# Altium PCB PCB1.PcbDoc
Units mm, origin at the board's own origin, x right, y up, seen from the top; angles counter-clockwise.
Board outline 100 x 100 mm, 2 copper layers (Top Layer, Bottom Layer); 30 components, 39 nets, 158 pads, 27 vias.
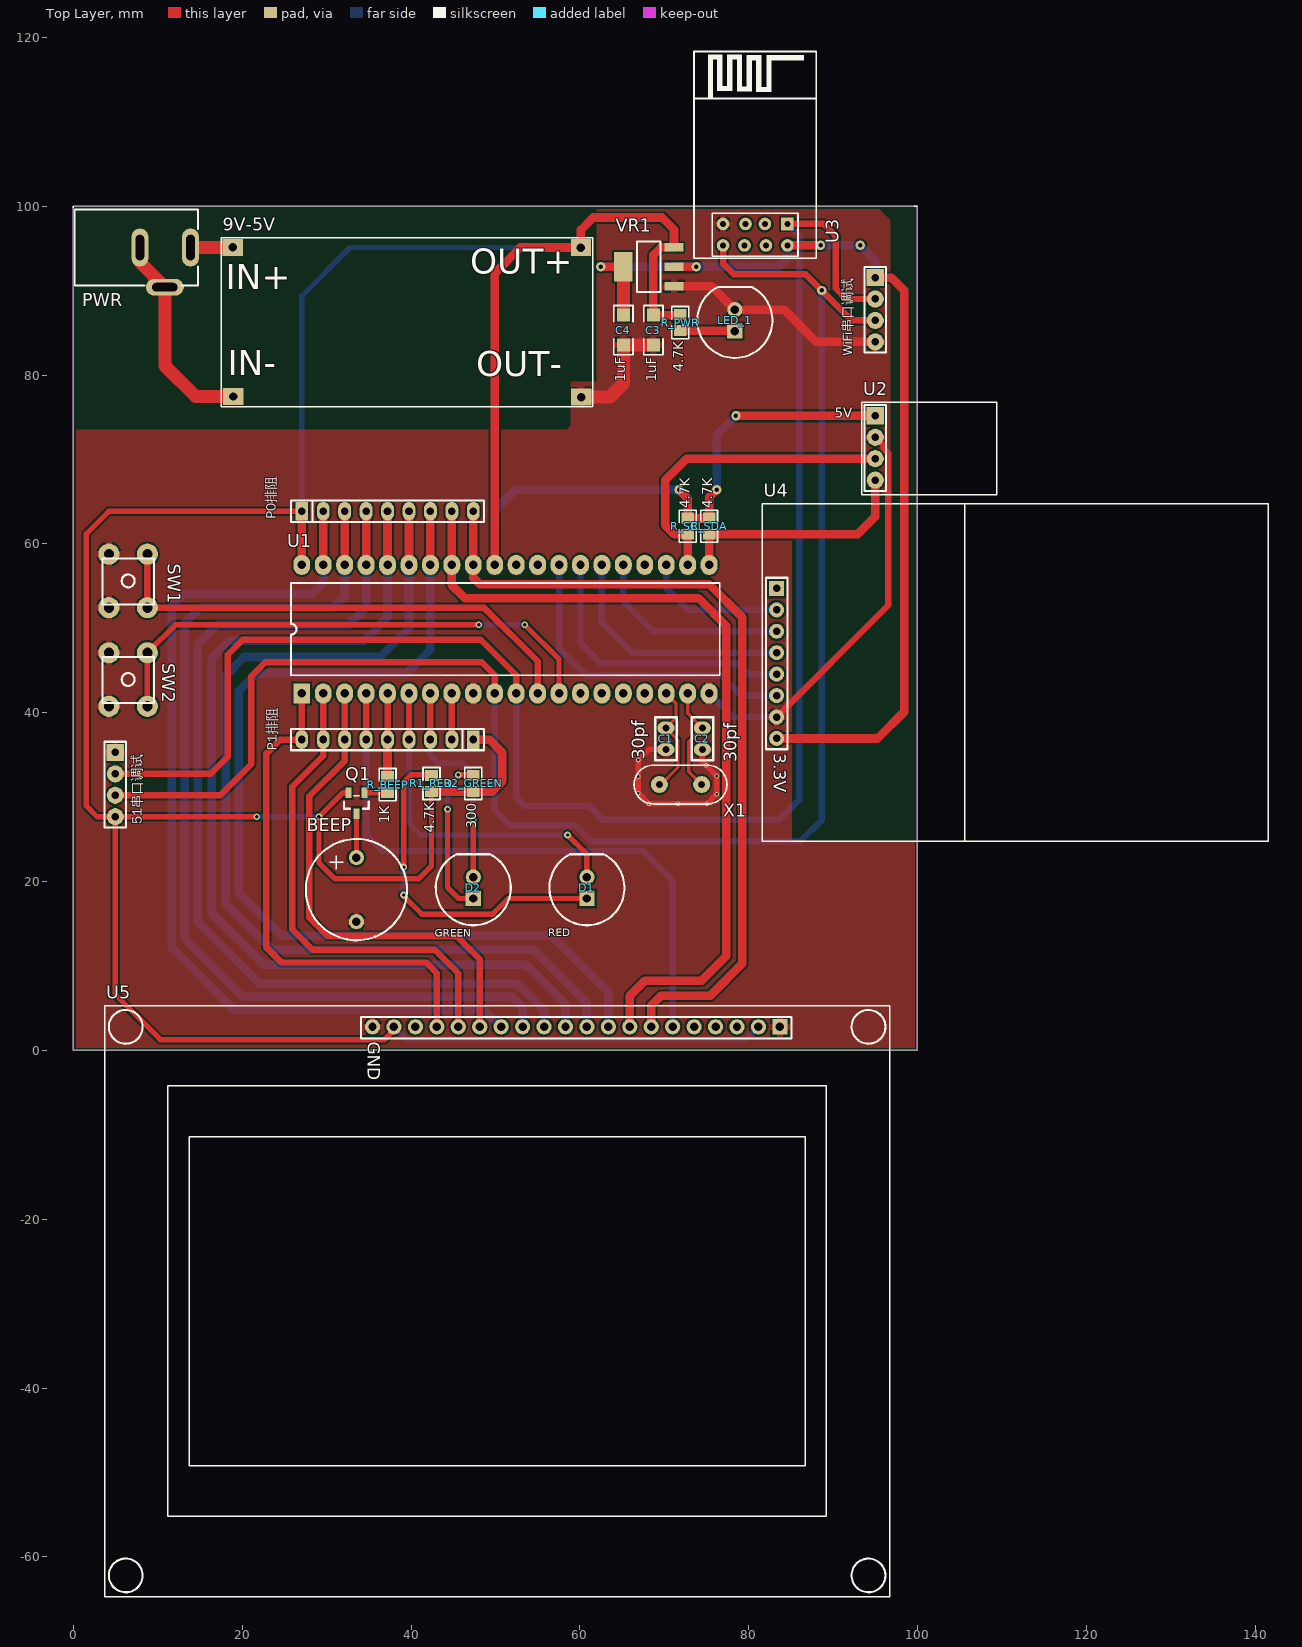
[diagram p0: Top Layer view]
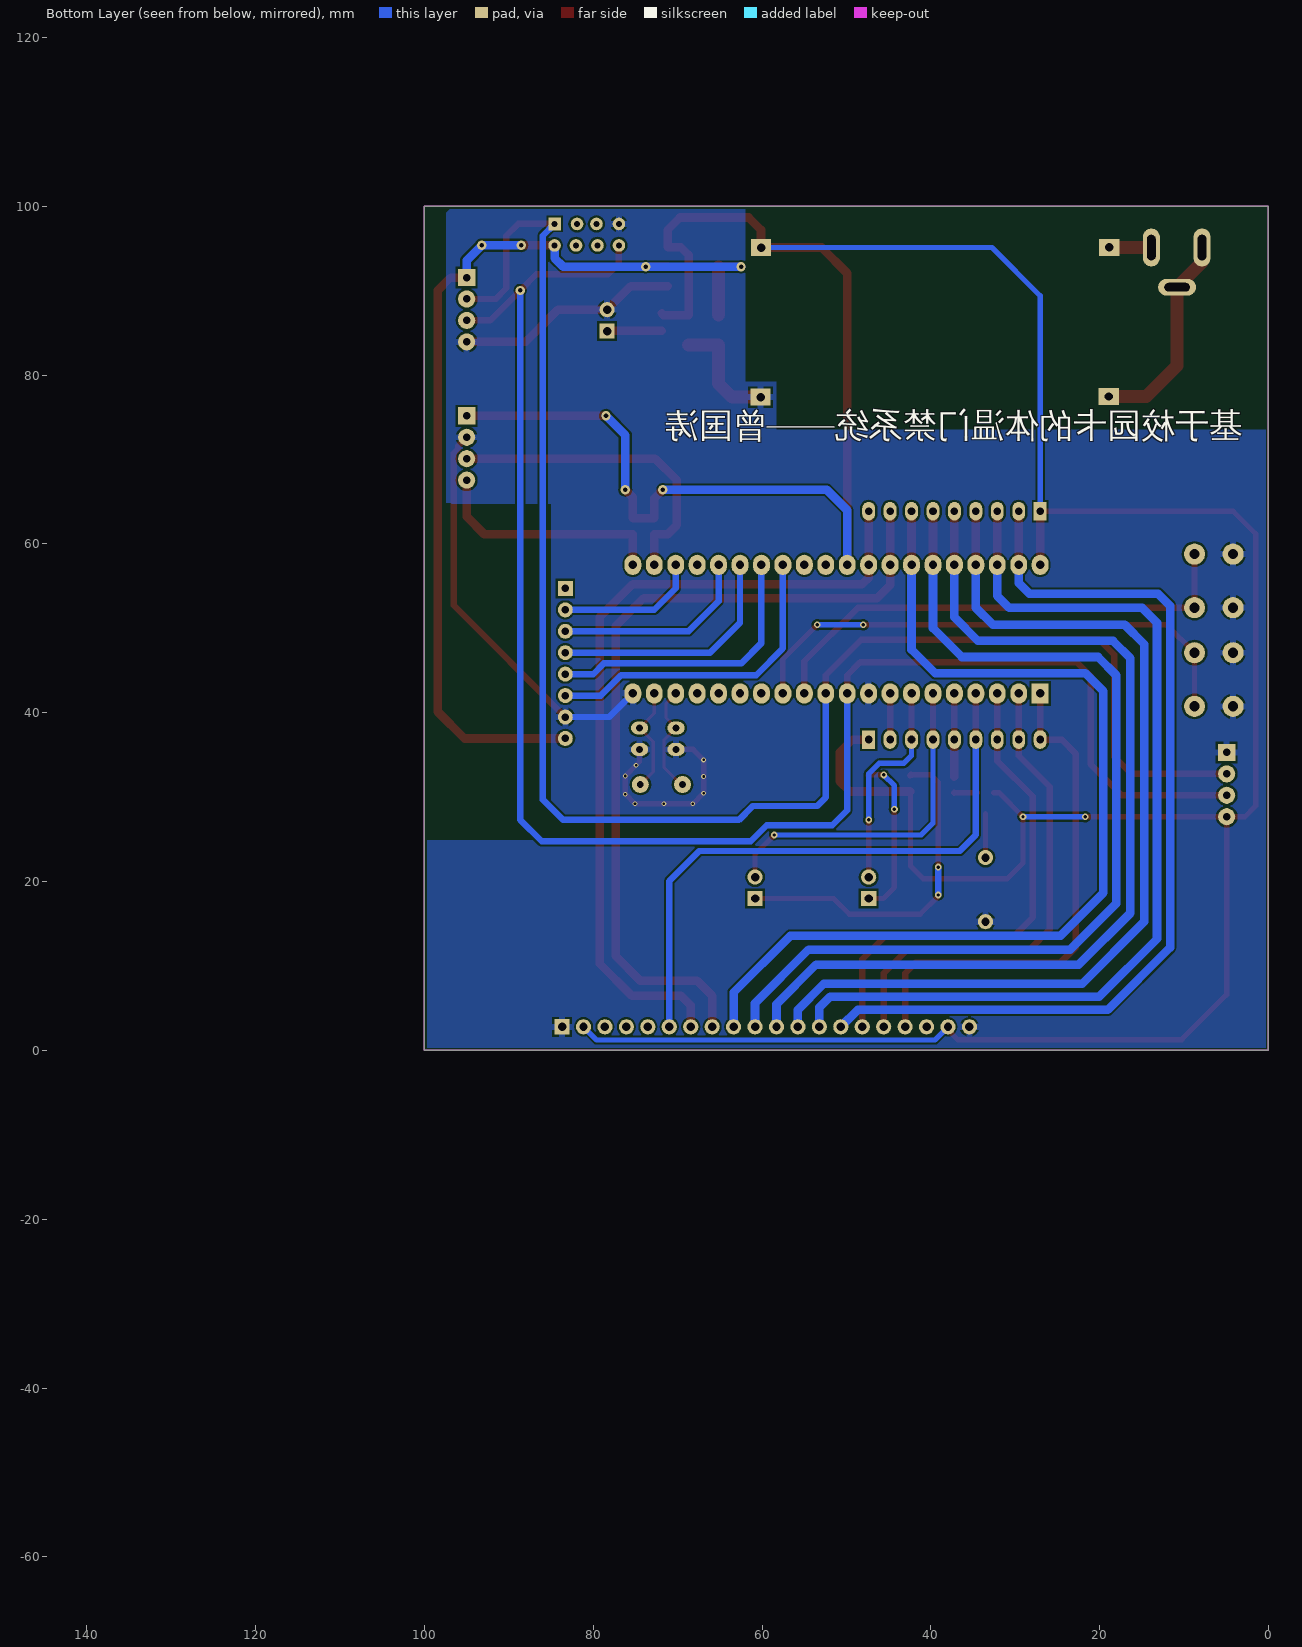
[diagram p1: Bottom Layer view, seen from below]

## Layer stack, top to bottom
Top Solder: solder mask 0.0102, Solder Resist, Dk 3.5
Top Layer: signal copper 0.0356
Dielectric 1: dielectric 0.32, FR-4, Dk 4.8
Bottom Layer: signal copper 0.0356
Bottom Solder: solder mask 0.0102, Solder Resist, Dk 3.5

## Board outline
0,0 100,0 100,100 0,100

## Design rules (kind name [scope] priority, off if disabled: settings)
Clearance [(IsTrack) vs (IsTrack)] p1 off: gap=0.152
Clearance POLY [InPolygon] p2: gap=0.254
Clearance VIA-POLY [ISVIA vs InPolygon] p3: gap=0.152
Clearance all [All] p4: gap=0.152
DiffPairsRouting DiffPair_90DiffPairsRouting [InDifferentialPairClass('90OM')] p1: maxlimit=0.178 minlimit=0.178 mostfreqgap=0.178 toplayer_minwidth=0.152 toplayer_maxwidth=0.152 toplayer_prefwidth=0.152 bottomlayer_minwidth=0.152 bottomlayer_maxwidth=0.152 bottomlayer_prefwidth=0.152 maxuncoupledlength=12.7
MatchedLengths DiffPair_90MatchedLengths [InDifferentialPair ('D_D')] p1: tolerance=25.4 checknetsindiffpair=FALSE checkdiffpairvsdiffpair=TRUE checkxsignals=TRUE checkothers=TRUE
PolygonConnect PolygonConnect_1 [ISVIA] p1: connectstyle=Direct reliefconductorwidth=0.254 reliefentries=4 polygonreliefangle="90 Angle" airgapwidth=0.254
PolygonConnect [All] p2: connectstyle=Relief reliefconductorwidth=0.762 reliefentries=4 polygonreliefangle="90 Angle" airgapwidth=0.254
RoutingVias [All] p1: holewidth=0.305 width=0.559 viastyle="Through Hole" minholewidth=0.305 minwidth=0.559 maxholewidth=1.524 maxwidth=3.048
SilkToSilkClearance [All] p1: silktosilkclearance=0.051
SilkToSolderMaskClearance [IsPad] p1: minsilkscreentomaskgap=0.051 clearancetoexposedcopper=TRUE
SolderMaskExpansion [All] p1: expansion=0.064
Width PWR [InNetClass('PWR')] p1: maxlimit=1.524 minlimit=0.152 preferedwidth=0.762
Width [All] p2: maxlimit=1.524 minlimit=0.152 preferedwidth=0.254
27 further rules are at their usual default settings.

## Components (designator, comment, footprint, x,y, rotation, side; value= is the part's Value field where it differs from the comment)
9V-5V "5A DC-DC可调降压电源模块" "5A DC-DC降压" 17.501,76.276 r0 top
51串口调试 "51_UART" HDR1*4 4.953,35.306 r0 top
BEEP "BEEP_蜂鸣器" BEEP_蜂鸣器 33.528,19.05 r0 top
C1 "30pf" RAD-0.1 70.231,36.957 r90 top
C2 "30pf" RAD-0.1 74.549,36.957 r90 top
C3 "1uF" 1206 68.707,85.344 r270 top
C4 "1uF" 1206 65.151,85.344 r270 top
D1 "RED" LED-R 60.833,17.995 r90 top
D2 "GREEN" LED-R 47.371,17.995 r90 top
LED_1 "LED_Plug_3" LED-R 78.359,85.217 r90 top
P0排阻 "10K" 排阻-9 27.102,63.854 r0 top
P1排阻 "10K" 排阻-9 47.32,36.857 r180 top
PWR "DC-005插座" DC-005插座 13.874,95.123 r180 top
Q1 "S8550" SOT-23(SOT-23-3) 33.528,29.286 r90 top
R1_RED "4.7K" 0805 42.418,31.623 r90 top
R2_GREEN "300" 0805 47.371,31.623 r90 top
R_BEEP "1K" 0805 37.211,31.496 r270 top
R_PWR "4.7K" 0805 71.882,86.233 r90 top
R_SCL "4.7K" 0805 72.771,62.103 r90 top
R_SDA "4.7K" 0805 75.311,62.103 r90 top
SW1 "P3_2" 6*6开关 4.191,58.801 r0 top
SW2 "P3_3" 6*6开关 4.191,47.117 r0 top
U1 "STC89C52_Plug" DIP-40 27.051,42.291 r90 top
U2 "I2C_MLX90614" I2C_MLX90614 93.37,76.81 r270 top
U3 "ESP01/01-S" ESP01/01-S 80.772,96.647 r0 top
U4 "RFID_RC522" RFID_RC522 81.585,64.77 r270 top
U5 "LCD12864_P20" LCD12864_P20 96.693,5.294 r180 top
VR1 "AMS1117-3.3" SOT-223 68.151,92.837 r0 top
WiFi串口调试 "WiFi_UART" HDR1*4 94.996,91.567 r0 top
X1 "11.0596MHz" XTAL1 69.422,31.496 r0 top

## Footprints (in the part's own frame and the unit in brackets; to place one, negate y for a bottom-side part, rotate by r counter-clockwise, add the part's x,y. Pads: shape width x height; smd on the part's side, far side on the other; paste and mask are expansions set on the pad)
"5A DC-DC降压" [mm]
  rect 2.4x2 hole 1: 1(1.372,18.872) 2(1.422,1.194) 3(42.621,18.847) 4(42.672,1.118)
  silkscreen extent 0,0 44,20
6*6开关 [mm]
  round 2.5 hole 1.2: 1(0,-6.35) 1(0,0) 2(4.572,-6.35) 2(4.572,0)
  silkscreen extent -0.76,-5.97 5.33,-0.51, body extent -0.84,-6.4 5.36,0.15, height 5
0805 [mm]
  rect 1.3x1.5 smd: 1(-0.95,0) 2(0.95,0)
  silkscreen extent -1.9,-1 1.9,1, body extent -1,-0.63 1,0.63, height 0.55
1206 [mil] "贴片元件"
  rect 60x60 smd: 1(-70,0) 2(70,0)
  silkscreen extent -115,-45 115,45, body extent -75,-35 75,35, height 39
BEEP_蜂鸣器 [mm]
  round 1.8 hole 1: 1(0,3.8) 2(0,-3.8)
  silkscreen extent -6,-6 6,6
DC-005插座 [mm]
  oval 2x4.5 hole 1 slot 3 at 90 deg: 1(0,0) 3(6,0)
  oval 4.5x2 hole 1 slot 3 at 0 deg: 2(3.048,4.7)
  silkscreen extent -0.88,-4.5 13.72,4.5, body extent -0.89,-4.44 13.72,4.45, height 11
DIP-40 [mm]
  rect 2.4x2 hole 1: 1(0,0)
  oval 2.4x2 hole 1: 2(0,-2.54) 3(0,-5.08) 4(0,-7.62) 5(0,-10.16) 6(0,-12.7) 7(0,-15.24) 8(0,-17.78) 9(0,-20.32) 10(0,-22.86) 11(0,-25.4) 12(0,-27.94) 13(0,-30.48) 14(0,-33.02) 15(0,-35.56) 16(0,-38.1) 17(0,-40.64) 18(0,-43.18) 19(0,-45.72) 20(0,-48.26) 21(15.24,-48.26) 22(15.24,-45.72) 23(15.24,-43.18) 24(15.24,-40.64) 25(15.24,-38.1) 26(15.24,-35.56) 27(15.24,-33.02) 28(15.24,-30.48) 29(15.24,-27.94) 30(15.24,-25.4) 31(15.24,-22.86) 32(15.24,-20.32) 33(15.24,-17.78) 34(15.24,-15.24) 35(15.24,-12.7) 36(15.24,-10.16) 37(15.24,-7.62) 38(15.24,-5.08) 39(15.24,-2.54) 40(15.24,0)
  silkscreen extent 2.16,-49.53 13.08,1.27, body extent -1.17,-50.29 16.43,1.97, height 8.39
ESP01/01-S [mm]
  rect 1.5x1.5 hole 0.7: 1(3.81,1.27)
  round 1.5 hole 0.7: 2(1.15,1.27) 3(-1.15,1.27) 4(-3.81,1.27) 5(3.81,-1.27) 6(1.27,-1.27) 7(-1.27,-1.27) 8(-3.81,-1.27)
  silkscreen extent -7.25,-2.79 7.25,21.71
HDR1*4 [mil]
  rect 80x80 hole 35: 1(0,0)
  round 80 hole 35: 2(0,-100) 3(0,-200) 4(0,-300)
  silkscreen extent -50,-350 50,50, body extent -50,-350 50,50, height 336
I2C_MLX90614 [mil]
  rect 80x80 hole 35: 1(64,64)
  round 80 hole 35: 2(164,64) 3(264,64) 4(364,64)
  silkscreen extent 0,0 433,630, body extent 14,14 414,114, height 336
LCD12864_P20 [mm]
  round 1.8 hole 1: 1(61.26,2.5) 2(58.72,2.5) 3(56.18,2.5) 4(53.64,2.5) 5(51.1,2.5) 6(48.56,2.5) 7(46.02,2.5) 8(43.48,2.5) 9(40.94,2.5) 10(38.4,2.5) 11(35.86,2.5) 12(33.32,2.5) 13(30.78,2.5) 14(28.24,2.5) 15(25.7,2.5) 16(23.16,2.5) 17(20.62,2.5) 18(18.08,2.5) 19(15.54,2.5)
  rect 1.8x1.8 hole 1: 20(13,2.5)
  silkscreen extent 0,0 93,70, body extent 11.73,1.23 62.53,3.77, height 8.54
LED-R [mm]
  rect 1.8x1.8 hole 1: 1(0,0)
  round 1.8 hole 1: 2(2.54,0)
  silkscreen extent -3.17,-4.44 5.25,4.44, body extent -3.23,-4.5 5.3,4.5, height 11
RAD-0.1 [mm]
  oval 1.524x2.032 hole 0.8: 1(-1.297,0.035) 2(1.243,0.035)
  silkscreen extent -2.57,-1.23 2.51,1.31, body extent -2.01,-1.95 1.96,2.02, height 7.39
RFID_RC522 [mil]
  rect 70x70 hole 35: 1(395,68)
  round 70 hole 35: 2(495,68) 3(595,68) 4(695,68) 5(795,68) 6(895,68) 7(995,68) 8(1095,68)
  silkscreen extent 0,0 1575,2362, body extent 345,18 1145,118, height 336
SOT-23(SOT-23-3) [mm]
  rect 1.25x0.7 smd: 1(1.25,-0.95) 2(1.25,0.95) 3(-1.25,0)
  silkscreen extent -0.65,-1.46 0.9,1.46, body extent -1.5,-1.5 1.5,1.5, height 1.3
SOT-223 [mm]
  rect 2.2x1 smd: 1(3,-2.3) 2(3,0) 3(3,2.3)
  rect 2.2x3.5 smd: 2(-3,0)
  silkscreen extent -1.4,-3 1.4,3, body extent -3.49,-3.24 3.49,3.24, height 1.64
XTAL1 [mm]
  round 2 hole 0.8: 1(0,0) 2(5,0)
  silkscreen extent -3,-2.3 8,2.3, body extent -2.79,-1.52 7.87,1.52, height 3.09
排阻-9 [mm]
  rect 1.524x2.2 hole 0.9: 1(-0.051,0.027)
  oval 1.524x2.2 hole 0.9: 2(2.489,0.027) 3(5.029,0.027) 4(7.569,0.027) 5(10.109,0.027) 6(12.649,0.027) 7(15.189,0.027) 8(17.729,0.027) 9(20.269,0.027)
  silkscreen extent -1.32,-1.24 21.54,1.3, body extent -1.15,-0.66 21.35,2.77, height 4.3

## Part data
51串口调试 WiFi串口调试: library part HEADER_直插式排针_1*4P
C1 C2: library part CAP_直插式电容_2.54
C3 C4: library part CAP_1206贴片电容
D1 D2 LED_1: library part LED_直插式_3MM
P0排阻 P1排阻: library part 排阻_P9
Q1: library part PNP
R1_RED R2_GREEN R_BEEP R_PWR R_SCL R_SDA: library part RES_电阻
SW1 SW2: library part SWITCH_开关
U1: library part 直插芯片_STC89C52
VR1: library part "SOT-223 AMS1117-3.3", "低压差线性稳压(LDO)"
X1: library part XTAL_直插式晶振_4.88MM

## Via types
v1: diameter 0.8, hole 0.4, Top Layer to Bottom Layer, tented both sides, 10 vias
v2: diameter 0.559, hole 0.305, Top Layer to Bottom Layer, tented both sides, 9 vias
v3: diameter 1.1, hole 0.55, Top Layer to Bottom Layer, tented both sides, 8 vias

## Nets (pads, with @x,y where several pads share a name; then routed paths per layer and width w, separated by ;. In a path a pad name is that pad's centre, name@x,y a point inside that pad or via, vN(x,y) a via of type N, cw(c..) or ccw(c..) an arc to the next point about the centre after c; other vN are vias at no path point)
3.3V: C4.1 U3.5 U4.8 VR1.2 WiFi串口调试.1 | length 118.6
  Top Layer w1.016: v3(62.484,92.837) VR1.2@65.151,92.837 ; VR1.2@71.151,92.837 v3(73.787,92.837) ; U4.8 95.25,36.957 98.425,40.132 98.425,90.043 96.901,91.567 WiFi串口调试.1 ; U3.5 v3(88.519,95.377)
  Top Layer w1.524: C4.1 VR1.2@65.151,92.837
  Bottom Layer w1.016: v3(62.484,92.837) v3(73.787,92.837) 83.566,92.837 84.582,93.853 U3.5 ; v3(88.519,95.377) v3(93.218,95.377) 94.996,93.599 WiFi串口调试.1
5V: 9V-5V.3 51串口调试.4 C3.1 P0排阻.1 P1排阻.1 Q1.2 R1_RED.1 R2_GREEN.1 R_PWR.2 R_SCL.2 R_SDA.2 U1.31 U1.40 U2.1 U5.2 U5.19 VR1.3 | length 447.5
  Top Layer w0.635: v1(21.717,27.686) 51串口调试.4 ; P0排阻.1 4.191,63.881 1.524,61.214 1.524,28.956 2.794,27.686 51串口调试.4 ; Q1.2 31.933,30.536 v1(29.083,27.686) 29.083,22.225 30.988,20.32 40.894,20.32 42.418,21.844 R1_RED.1 ; U5.2 37.973,2.413 36.83,1.27 10.287,1.27 4.953,6.604 51串口调试.4
  Top Layer w1.016: U1.40 P0排阻.1 ; R1_RED.1 R2_GREEN.1 49.596,30.673 50.8,31.877 50.8,35.306 49.276,36.83 P1排阻.1 ; U1.31 49.911,92.075 52.959,95.123 9V-5V.3 60.122,97.206 61.595,98.679 69.723,98.679 71.151,97.251 VR1.3 69.61,95.137 68.707,94.234 C3.1 71.689,87.122 R_PWR.2@71.882,87.315 ; v3(71.755,66.421) 72.771,65.405 R_SCL.2 R_SDA.2 75.311,65.532 v3(76.2,66.421) ; v3(78.486,75.184) U2.1 ; U5.19@81.153,2.54 U5.19
  Bottom Layer w0.635: v1(21.717,27.686) v1(29.083,27.686) ; P0排阻.1 27.051,89.408 32.766,95.123 9V-5V.3 ; U5.2 39.533,1.234 79.593,1.234 U5.19
  Bottom Layer w1.016: U1.31 49.911,64.008 52.324,66.421 v3(71.755,66.421) ; v3(76.2,66.421) 76.2,72.898 v3(78.486,75.184)
D0: P0排阻.2 U1.39 U5.7 | length 111
  Top Layer w1.016: U1.39 P0排阻.2
  Bottom Layer w1.016: U1.39 29.591,55.372 28.321,54.102 13.081,54.102 11.659,52.68 11.659,12.192 19.025,4.826 48.641,4.826 U5.7
D1: P0排阻.3 U1.38 U5.8 | length 113.4
  Top Layer w1.016: U1.38 P0排阻.3
  Bottom Layer w1.016: U1.38 32.131,53.848 30.734,52.451 14.986,52.451 13.208,50.673 13.208,13.208 20.066,6.35 51.943,6.35 53.213,5.08 U5.8
D2: P0排阻.4 U1.37 U5.9 | length 113.4
  Top Layer w1.016: U1.37 P0排阻.4
  Bottom Layer w1.016: U1.37 34.671,52.451 32.639,50.419 17.018,50.419 14.732,48.133 14.732,15.24 22.098,7.874 52.705,7.874 55.753,4.826 U5.9
D3: P0排阻.5 U1.36 U5.10 | length 114.7
  Top Layer w1.016: U1.36 P0排阻.5
  Bottom Layer w1.016: U1.36 37.211,51.308 34.417,48.514 18.415,48.514 16.383,46.482 16.383,16.256 22.479,10.16 53.594,10.16 58.293,5.461 U5.10
D4: P0排阻.6 U1.35 U5.11 | length 115.4
  Top Layer w1.016: U1.35 P0排阻.6
  Bottom Layer w1.016: U1.35 39.751,50.038 36.322,46.609 20.193,46.609 18.034,44.45 18.034,17.399 23.495,11.938 54.483,11.938 60.833,5.588 U5.11
D5: P0排阻.7 U1.34 U5.12 | length 117.8
  Top Layer w1.016: U1.34 P0排阻.7
  Bottom Layer w1.016: U1.34 42.291,47.498 39.497,44.704 21.717,44.704 19.558,42.545 19.558,18.669 24.638,13.589 56.642,13.589 63.373,6.858 U5.12
D6: P0排阻.8 U1.33 U5.13 | length 99.4
  Top Layer w1.016: P0排阻.8 U1.33 44.831,55.118 46.355,53.594 74.041,53.594 77.343,50.292 77.343,11.176 74.422,8.255 67.691,8.255 65.913,6.477 U5.13
D7: P0排阻.9 U1.32 U5.14 | length 98.1
  Top Layer w1.016: P0排阻.9 U1.32 47.371,56.007 48.133,55.245 75.311,55.245 79.248,51.308 79.248,10.287 75.438,6.477 69.596,6.477 68.453,5.334 U5.14
GND: 9V-5V.4 51串口调试.1 BEEP.2 C1.1 C2.1 C3.2 C4.2 LED_1.2 SW1.1 SW2.1 U1.9 U1.20 U2.2 U3.4 U4.7 U5.1 U5.20 VR1.1 WiFi串口调试.4 | length 112.8
  Top Layer w0.635: C1.1 68.172,35.66 v2(66.929,34.417) v2(66.929,32.448) v2(66.929,30.48) v2(68.199,29.21) v2(71.628,29.21) v2(75.057,29.21) v2(76.2,30.353) v2(76.2,32.512) v2(74.93,33.782) 74.514,34.198 C2.1
  Top Layer w0.762: U4.7 96.545,52.73 96.545,70.746 96.012,71.279 96.012,71.628 U2.2
  Top Layer w1.016: VR1.1 75.579,90.537 LED_1.2 84.201,87.757 88.011,83.947 WiFi串口调试.4
  Top Layer w1.524: 9V-5V.4 63.551,77.394 65.151,78.994 C4.2 C3.2
  Bottom Layer w0.762: U1.20 78.105,39.497 U4.7
MISO: U1.27 U4.5 | length 34
  Bottom Layer w0.762: U1.27 60.071,48.26 62.484,45.847 78.74,45.847 80.01,44.577 U4.5
MOSI: U1.26 U4.4 | length 29
  Bottom Layer w0.762: U1.26 62.611,50.673 66.167,47.117 U4.4
Net9V-5V_1: 9V-5V.1 PWR.1 | length 5
  Top Layer w0.254: 9V-5V.1@18.847,95.123 9V-5V.1
  Top Layer w1.524: PWR.1 9V-5V.1@18.847,95.123
Net9V-5V_2: 9V-5V.2 PWR.2 PWR.3 | length 24.8
  Top Layer w0.254: PWR.3@7.874,93.375 PWR.3
  Top Layer w1.524: PWR.3@7.874,93.375 PWR.2 10.826,81.122 14.478,77.47 9V-5V.2
NetBEEP_1: BEEP.1 Q1.3 | length 5.2
  Top Layer w0.635: BEEP.1 Q1.3
NetD1_1: D1.1 R1_RED.2 | length 40.5
  Top Layer w0.635: v1(39.116,18.415) 39.116,18.288 41.275,16.129 49.657,16.129 51.523,17.995 D1.1 ; v1(39.116,21.717) 39.116,31.75 40.005,32.639 R1_RED.2@42.352,32.639
  Top Layer w0.762: R1_RED.2@42.352,32.639 R1_RED.2
  Bottom Layer w0.762: v1(39.116,18.415) v1(39.116,21.717)
NetD2_1: D2.1 R2_GREEN.2 | length 19.3
  Top Layer w0.635: v1(44.323,28.575) 44.323,19.304 45.632,17.995 D2.1 ; v1(45.593,32.639) R2_GREEN.2@47.305,32.639
  Top Layer w0.762: R2_GREEN.2@47.305,32.639 R2_GREEN.2
  Bottom Layer w0.635: v1(44.323,28.575) 44.323,31.369 v1(45.593,32.639)
NetLED_1_1: LED_1.1 R_PWR.1 | length 6.5
  Top Layer w1.016: R_PWR.1 78.293,85.283 LED_1.1
NetQ1_1: Q1.1 R_BEEP.2 | length 2.7
  Top Layer w0.635: Q1.1 R_BEEP.2@37.201,30.536
  Top Layer w0.762: R_BEEP.2@37.201,30.536 R_BEEP.2
NSS: U1.23 U4.2 | length 16.9
  Bottom Layer w0.762: U1.23 70.231,54.737 72.771,52.197 U4.2
P1.0: P1排阻.9 U1.1 U5.4 | length 61.1
  Top Layer w0.762: U1.1 P1排阻.9 24.511,36.83 22.86,35.179 22.86,12.192 24.638,10.414 41.783,10.414 43.053,9.144 U5.4
P1.1: P1排阻.8 U1.2 U5.5 | length 57.7
  Top Layer w0.762: U1.2 P1排阻.8 29.591,34.925 25.908,31.242 25.908,14.351 28.321,11.938 42.799,11.938 45.593,9.144 U5.5
P1.2: P1排阻.7 U1.3 U5.6 | length 58.5
  Top Layer w0.762: U1.3 P1排阻.7 32.131,34.29 27.94,30.099 27.94,15.748 30.099,13.589 45.339,13.589 48.133,10.795 U5.6
P1.3: P1排阻.6 U1.4 U5.15 | length 72.6
  Top Layer w0.762: P1排阻.6 U1.4
  Bottom Layer w0.762: P1排阻.6 34.671,25.527 36.576,23.622 67.437,23.622 70.993,20.066 U5.15
P1.4: P1排阻.5 R_BEEP.1 U1.5 | length 9.8
  Top Layer w0.762: P1排阻.5 U1.5
  Top Layer w1.016: R_BEEP.1 P1排阻.5
P1.5: D1.2 P1排阻.4 U1.6 | length 40.7
  Top Layer w0.635: v1(58.547,25.527) 60.833,23.241 D1.2
  Top Layer w0.762: P1排阻.4 U1.6
  Bottom Layer w0.635: P1排阻.4 39.751,26.924 41.148,25.527 v1(58.547,25.527)
P1.6: D2.2 P1排阻.3 U1.7 | length 25.6
  Top Layer w0.635: D2.2 v1(47.371,27.305)
  Top Layer w0.762: P1排阻.3 U1.7
  Bottom Layer w0.635: P1排阻.3 42.291,34.925 43.18,34.036 46.101,34.036 47.371,32.766 v1(47.371,27.305)
P1.7: P1排阻.2 U1.8 | length 5.5
  Top Layer w0.762: P1排阻.2 U1.8
P3.2: SW1.2 U1.12 | length 59
  Top Layer w0.762: SW1.2@8.763,58.801 8.763,52.451 48.641,52.451 54.991,46.101 U1.12
P3.3: SW2.2 U1.13 | length 62.2
  Top Layer w0.635: SW2.2@8.763,40.767 8.763,47.117 12.065,50.419 v1(48.006,50.419) ; v1(53.467,50.419) 57.531,46.355 U1.13
  Bottom Layer w0.635: v1(48.006,50.419) v1(53.467,50.419)
RC522_RST: U1.28 U4.6 | length 38
  Bottom Layer w0.762: U1.28 57.531,47.625 60.706,44.45 76.708,44.45 79.121,42.037 U4.6
RXD: 51串口调试.3 U1.10 U3.8 WiFi串口调试.3 | length 201.2
  Top Layer w0.762: 51串口调试.3 17.399,30.226 21.082,33.909 21.082,44.323 22.733,45.974 48.387,45.974 49.911,44.45 U1.10 ; U3.8 76.962,93.218 78.232,91.948 86.741,91.948 v3(88.646,90.043) 92.202,86.487 WiFi串口调试.3
  Bottom Layer w0.762: U1.10 49.911,28.448 51.689,26.67 59.436,26.67 61.341,24.765 86.106,24.765 88.646,27.305 v3(88.646,90.043)
SCK: U1.25 U4.3 | length 24
  Bottom Layer w0.762: U1.25 65.151,53.213 68.707,49.657 U4.3
SCL: R_SCL.1 U1.22 U2.3 | length 38
  Top Layer w1.016: U1.22 R_SCL.1 71.181,61.153 70.104,62.23 70.104,67.564 72.644,70.104 U2.3
SDA: R_SDA.1 U1.21 U2.4 | length 28.5
  Top Layer w1.016: U1.21 R_SDA.1 92.903,61.153 94.996,63.246 U2.4
TXD: 51串口调试.2 U1.11 U3.1 WiFi串口调试.2 | length 199.5
  Top Layer w0.762: 51串口调试.2 16.256,32.766 18.288,34.798 18.288,46.863 20.066,48.641 48.26,48.641 52.451,44.45 U1.11 ; U3.1 88.9,97.917 90.297,96.52 90.297,90.297 91.567,89.027 WiFi串口调试.2
  Bottom Layer w0.762: U1.11 52.451,29.972 53.467,28.956 61.087,28.956 62.738,27.305 83.566,27.305 85.979,29.718 85.979,96.52 U3.1
XTL1: C2.2 U1.19 X1.2 | length 12.9
  Top Layer w0.152: X1.2@74.295,31.496 X1.2
  Top Layer w0.381: U1.19 72.771,39.943 C2.2 72.898,36.584 72.898,33.02 X1.2
XTL2: C1.2 U1.18 X1.1 | length 13.4
  Top Layer w0.381: X1.1 69.596,31.496 71.628,33.528 71.628,36.768 C1.2 71.374,39.378 71.374,41.148 U1.18 U1.18@70.196,42.256
pads on no net: U1.14 U1.15 U1.16 U1.17 U1.24 U1.29 U1.30 U3.2 U3.3 U3.6 U3.7 U4.1 U5.3 U5.16 U5.17 U5.18

## Polygon pours and split planes (outlines as drawn)
GND on Top Layer "Top Layer-No Net" (solid, remove dead copper, pour order 0): 0,73.533 0,0.254 99.746,0.254 100,0 100,24.765 85.471,24.765 85.09,25.146 85.09,65.913 96.647,65.913 96.774,66.04 96.774,76.835 96.774,98.349 95.123,100 61.976,100 61.976,79.248 58.928,79.248 58.928,76.327 58.801,76.2 58.928,76.073 58.928,74.549 58.928,74.041 58.42,73.533
GND on Bottom Layer "Top Layer-No Net" (solid, remove dead copper, pour order 2): 61.849,100 61.976,99.873 61.976,79.248 58.293,79.248 58.293,73.533 0,73.533 0,0 100,0 100,24.892 85.09,24.892 84.963,24.765 84.963,64.77 96.774,64.77 96.901,64.897 97.409,64.897 97.409,99.238 96.647,100

## Keep-outs
Keep-Out Layer:
  the board outline again, w0.152

## Silkscreen, mask and mechanical layers (free items; w line width, h text height)
Top Overlay:
  lines w0.152: 0,99.822 0,100 ; 99.619,100 100,100
  text "5V" at 90.17,74.549 h2
Bottom Overlay:
  text "基于校园卡的体温门禁系统——曾国涛" at 3.048,71.628 h5

## Text inside footprints (layer, text, board x,y; h text height)
9V-5V: Top Overlay "OUT-" at 47.701,78.892 h5.08; Top Overlay "OUT+" at 47.015,90.983 h5.08; Top Overlay "IN-" at 18.263,78.994 h5.08; Top Overlay "IN+" at 18.034,89.154 h5.08
U4: Top Overlay "3.3V" at 82.448,35.179 h2.5 r270
U5: Top Overlay "GND" at 34.361,1.001 h2.5 r270